# Altium PCB PCB1.PcbDoc
Units mil, origin at the board's own origin, x right, y up, seen from the top; angles counter-clockwise.
Board outline 2421.47 x 984.32 mil, 2 copper layers (Top Layer, Bottom Layer); 4 components, 0 nets, 33 pads, 0 vias.
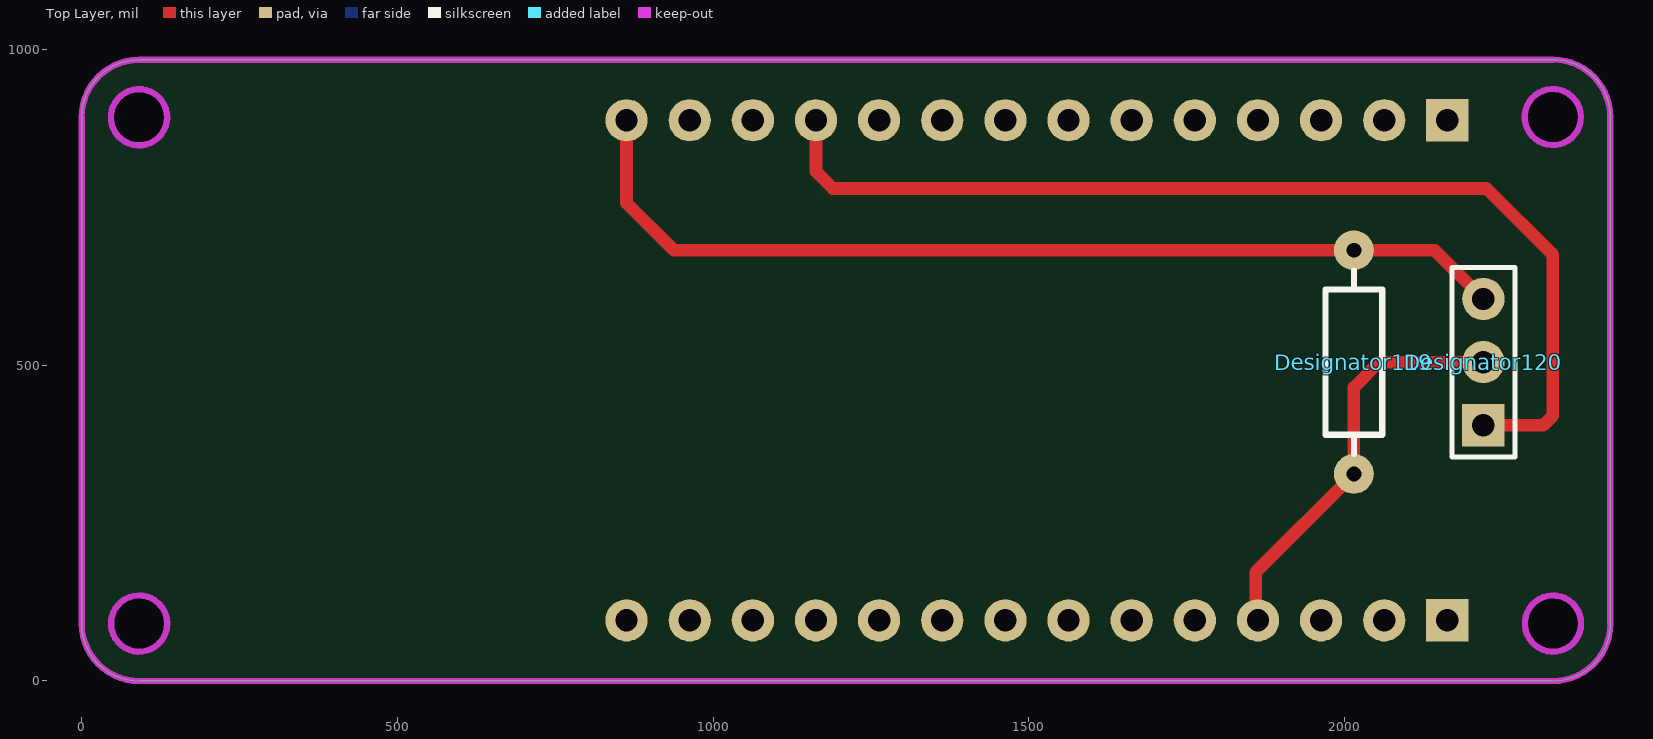
[diagram p0: Top Layer view]
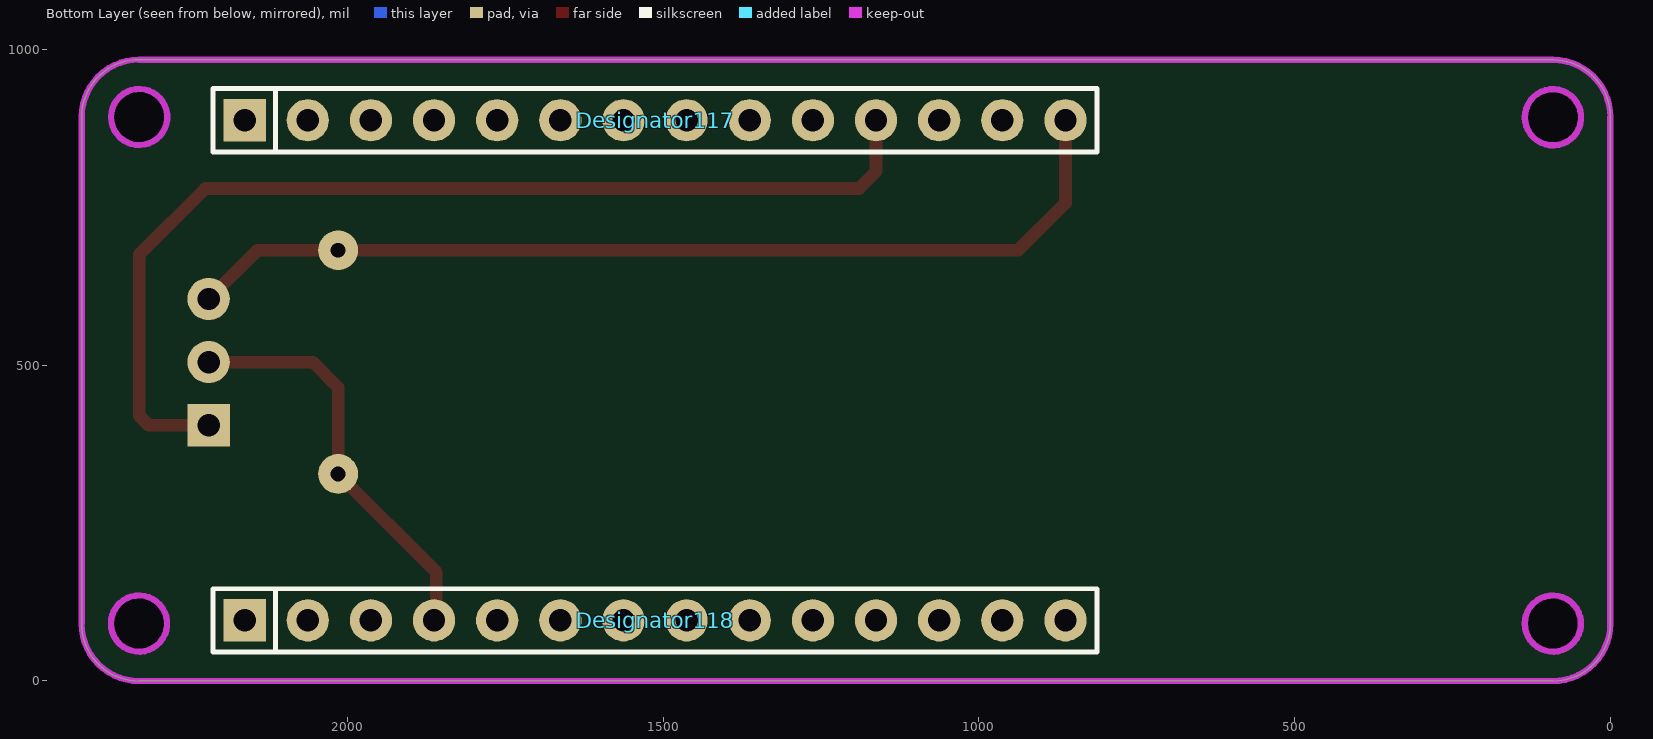
[diagram p1: Bottom Layer view, seen from below]

## Layer stack, top to bottom
Top Solder: solder mask 0.4, Solder Resist, Dk 3.5
Top Layer: signal copper 1.4
Dielectric 1: dielectric 12.6, FR-4, Dk 4.8
Bottom Layer: signal copper 1.4
Bottom Solder: solder mask 0.4, Solder Resist, Dk 3.5

## Board outline
0,90.84 0,892.73 -0.19,892.73 cw(c90.81,892.73) 90.81,983.73 90.81,984 2330.07,984 2330.07,984.16 cw(c2330.07,893.16) 2421.07,893.16 2421,893.16 2421,90.86 2421.28,90.86 cw(c2330.28,90.86) 2330.28,-0.14 2330.28,0 90.96,0 90.96,-0.16 cw(c90.96,90.84)
cut-out: 2285.78,90.86 ccw(c2330.28,90.86) 2330.28,46.36 ccw(c2330.28,90.86) 2374.78,90.86 ccw(c2330.28,90.86) 2330.28,135.36 ccw(c2330.28,90.86)
cut-out: 2285.57,893.16 ccw(c2330.07,893.16) 2330.07,848.66 ccw(c2330.07,893.16) 2374.57,893.16 ccw(c2330.07,893.16) 2330.07,937.66 ccw(c2330.07,893.16)
cut-out: 46.46,90.84 ccw(c90.96,90.84) 90.96,46.34 ccw(c90.96,90.84) 135.46,90.84 ccw(c90.96,90.84) 90.96,135.34 ccw(c90.96,90.84)
cut-out: 90.81,848.23 cw(c90.81,892.73) 46.31,892.73 cw(c90.81,892.73) 90.81,937.23 cw(c90.81,892.73) 135.31,892.73 cw(c90.81,892.73)

## Design rules (kind name [scope] priority, off if disabled: settings)
Clearance [All] p1: gap=10 ignorepadtopadclearanceinfootprint=FALSE except(0: Arc-Hole Track-Hole SMDPad-Hole THPad-Hole Via-Hole Fill-Hole Poly-Hole Region-Hole Text-Hole)
PolygonConnect [All] p1: connectstyle=Relief reliefconductorwidth=10 reliefentries=4 polygonreliefangle="90 Angle" airgapwidth=10
RoutingVias [All] p1: holewidth=28 width=50 viastyle="Through Hole" minholewidth=28 minwidth=50 maxholewidth=28 maxwidth=50
SolderMaskExpansion [All] p1: expansion=4 istentingtop=FALSE
Width [All] p1: maxlimit=10 minlimit=10 preferedwidth=10
30 further rules are at their usual default settings.

## Components (designator, comment, footprint, x,y, rotation, side; value= is the part's Value field where it differs from the comment)
Designator117 "Comment" HDR2.54-LI-14P 1513,888 r180 bottom
Designator118 "Comment" HDR2.54-LI-14P 1513,96 r180 bottom
Designator119 "Comment" "RS 1/4W" 2015,505 r90 top
Designator120 "Comment" HDR2.54-LI-3P 2220,505 r90 top

## Footprints (in the part's own frame and the unit in brackets; to place one, negate y for a bottom-side part, rotate by r counter-clockwise, add the part's x,y. Pads: shape width x height; smd on the part's side, far side on the other; paste and mask are expansions set on the pad)
HDR2.54-LI-3P [mm] "排针，3脚"
  rect 1.7x1.7 hole 0.9: 1(-2.54,0)
  round 1.7 hole 0.9: 2(0,0) 3(2.54,0)
  silkscreen extent -3.81,-1.27 3.81,1.27, body extent -3.81,-1.27 3.81,1.27, height 8.5
HDR2.54-LI-14P [mm] "排针，14脚"
  rect 1.7x1.7 hole 0.9: 1(-16.51,0)
  round 1.7 hole 0.9: 2(-13.97,0) 3(-11.43,0) 4(-8.89,0) 5(-6.35,0) 6(-3.81,0) 7(-1.27,0) 8(1.27,0) 9(3.81,0) 10(6.35,0) 11(8.89,0) 12(11.43,0) 13(13.97,0) 14(16.51,0)
  silkscreen extent -17.78,-1.27 17.78,1.27, body extent -17.78,-1.27 17.78,1.27, height 8.5
"RS 1/4W" [mm] "直插色环电阻，脚距9mm，直径2.3mm"
  round 1.6 hole 0.6: 1(-4.5,0) 2(4.5,0)
  silkscreen extent -3.68,-1.14 3.68,1.14, body extent -4.72,-1.16 4.73,1.16, height 2.32

## Nets (pads, with @x,y where several pads share a name; then routed paths per layer and width w, separated by ;. In a path a pad name is that pad's centre, name@x,y a point inside that pad or via, vN(x,y) a via of type N, cw(c..) or ccw(c..) an arc to the next point about the centre after c; other vN are vias at no path point)
pads on no net: Designator117.1 Designator117.2 Designator117.3 Designator117.4 Designator117.5 Designator117.6 Designator117.7 Designator117.8 Designator117.9 Designator117.10 Designator117.11 Designator117.12 Designator117.13 Designator117.14 Designator118.1 Designator118.2 Designator118.3 Designator118.4 Designator118.5 Designator118.6 Designator118.7 Designator118.8 Designator118.9 Designator118.10 Designator118.11 Designator118.12 Designator118.13 Designator118.14 Designator119.1 Designator119.2 Designator120.1 Designator120.2 Designator120.3
copper on no net: | length 3886.1
  Top Layer w20: 863,888 863,757 937.83,682.17 1480,682.17 2015,682.17 2142.83,682.17 2220,605 ; 1163,888 1163,807 1190,780 1590,780 2225,780 2330,675 2330,420 2315,405 2220,405 ; 1856.12,102.88 1863,96 ; 1859.56,99.44 1859.56,172.4 2015,327.83 2015,465 2055,505 2220,505

## Keep-outs
Keep-Out Layer:
  circle w10: c90.96,90.84 r44.5
  circle w10: c2330.28,90.86 r44.5
  circle w10: c2330.07,893.16 r44.5
  circle w10: c90.81,892.73 r44.5
  lines w10: -0.19,892.73 cw(c90.81,892.73) 90.81,983.73 ; -0.04,90.84 ccw(c90.96,90.84) 90.96,-0.16 ; 0,90.84 0,892.73 ; 90.81,984 2330.07,984 ; 90.96,0 2330.28,0 ; 2330.07,984.16 cw(c2330.07,893.16) 2421.07,893.16 ; 2330.28,-0.14 ccw(c2330.28,90.86) 2421.28,90.86 ; 2421,90.86 2421,893.16